# Altium PCB MB_v1.PcbDoc (part 3 of 10)
Units mm, origin at the board's own origin, x right, y up, seen from the top; angles counter-clockwise.
Board outline 203 x 72 mm, 6 copper layers (Top Layer, Layer 3, Layer 1, Layer 2, Layer 4, Bottom Layer), stack 1.52 mm thick; 655 components, 569 nets, 2943 pads, 1834 vias.
Unrouted connection lines stored in the file: 31.
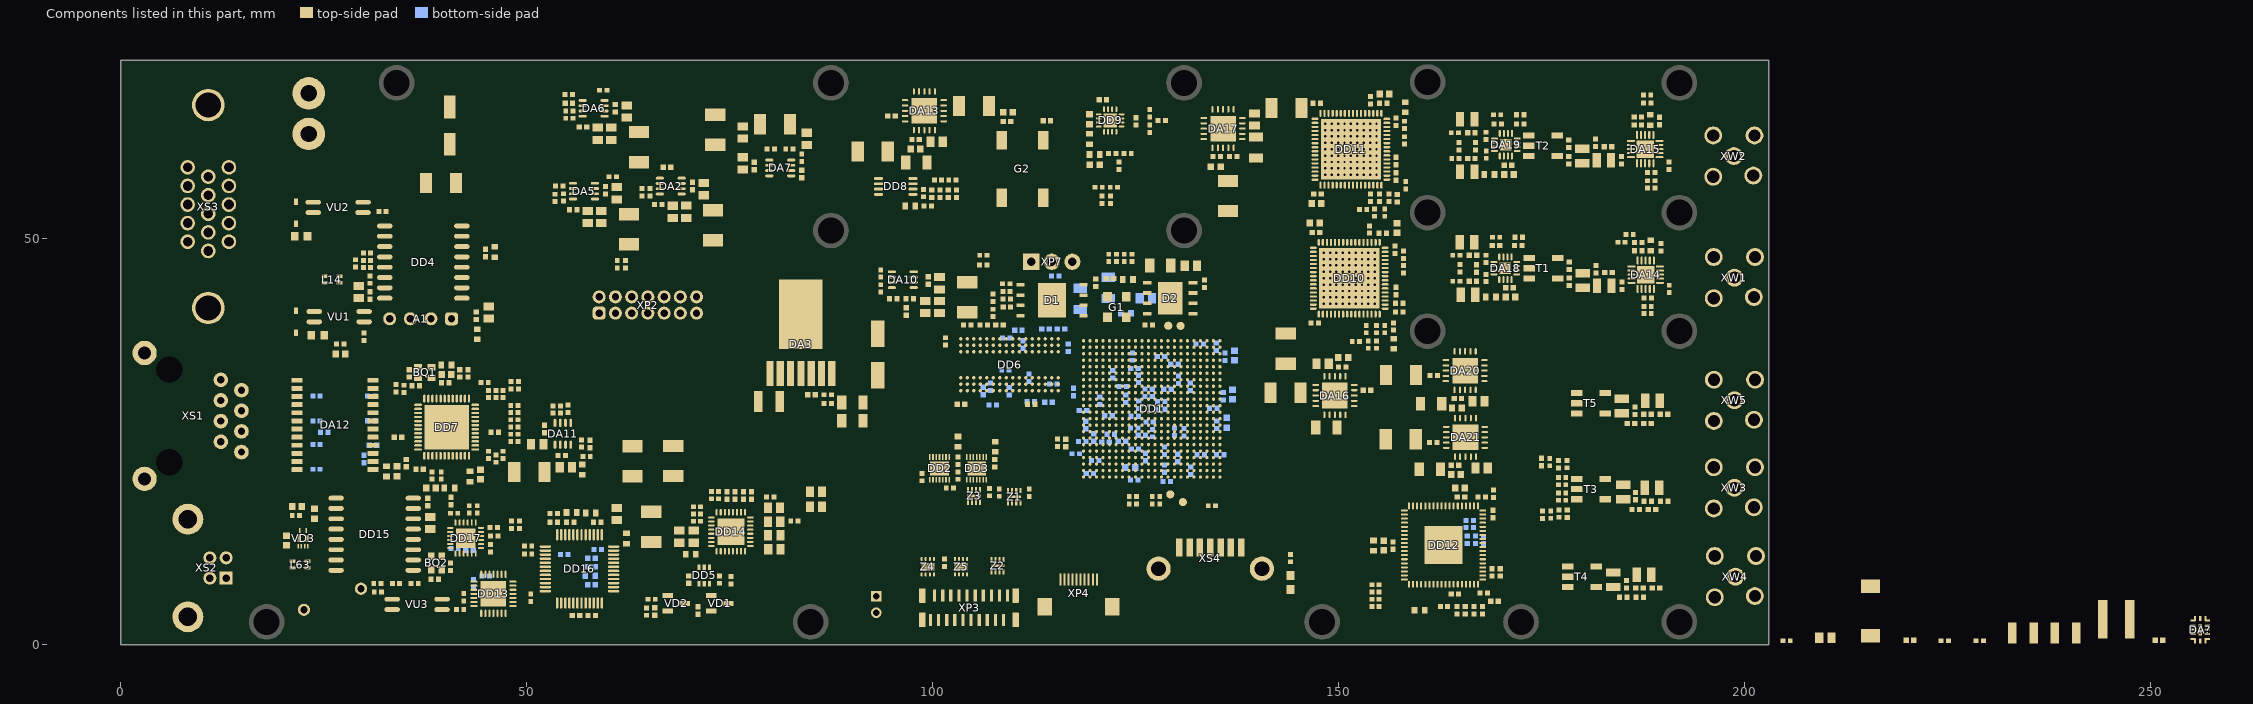
[diagram p6: the components of this part, seen from the top]

## Part data (continued)
R10 R124 R127 R170: library part "Чип резистор 0402 *", "ЧИП-резистор", Tolerance=±5%, PackageReference=0402, TKE="100 ppm/°С"
R11 R12 R14 R19 R151 R156 R158 R159 R163: library part "Чип резистор 0402 20 кОм, 5%", "ЧИП-резистор", Tolerance=±5%, PackageReference=0402, TKE="100 ppm/°С"
R13: library part "Чип резистор 0402 27 кОм, 5%", "ЧИП-резистор", Tolerance=±5%, PackageReference=0402, TKE="100 ppm/°С"
R15: library part "Чип резистор 0402 33 кОм, 5%", "ЧИП-резистор", Tolerance=±5%, PackageReference=0402, TKE="100 ppm/°С"
R17: library part "Чип резистор 0402 39 кОм, 5%", "ЧИП-резистор", Tolerance=±5%, PackageReference=0402, TKE="100 ppm/°С"
R22 R31 R32 R58 R160: library part "Чип резистор 0402 4,7 кОм, 5%", "ЧИП-резистор", Tolerance=±5%, PackageReference=0402, TKE="100 ppm/°С"
R23 R26: library part "Чип резистор 0402 510 Ом, 5%", "ЧИП-резистор", Tolerance=±5%, PackageReference=0402, TKE="100 ppm/°С"
R24 R25: library part "Чип резистор 0402 4,7 кОм, 1%", "ЧИП-резистор", Tolerance=±1%, PackageReference=0402, TKE="100 ppm/°С"
R33 R34 R35 R36 R40 R41: library part "Чип резистор 0402 180 кОм, 5%", "ЧИП-резистор", Tolerance=±5%, PackageReference=0402, TKE="100 ppm/°С"
R37 R44 R114 R122: library part "Чип резистор 0402 2 кОм, 5%", "ЧИП-резистор", Tolerance=±5%, PackageReference=0402, TKE="100 ppm/°С"
R38 R39 R144: library part "Чип резистор 0402 820 Ом, 5%", "ЧИП-резистор", Tolerance=±5%, PackageReference=0402, TKE="100 ppm/°С"
R42 R43 R109 R110 R111 R112: library part "Чип резистор 0402 15 Ом, 5%", "ЧИП-резистор", Tolerance=±5%, PackageReference=0402, TKE="100 ppm/°С"
R45: library part "Чип резистор 0402 3,3 кОм, 5%", "ЧИП-резистор", Tolerance=±5%, PackageReference=0402, TKE="100 ppm/°С"
R46: library part "Чип резистор 0402 120 Ом, 5%", "ЧИП-резистор", Tolerance=±5%, PackageReference=0402, TKE="100 ppm/°С"
R47 R48 R56: library part "Чип резистор 0402 80,6 Ом, 1%_1", "ЧИП-резистор", Tolerance=±1%, PackageReference=0402, TKE="100 ppm/°С"
R50: library part "Чип резистор 0402 9,53 кОм, 1%", "ЧИП-резистор", Tolerance=±1%, PackageReference=0402, TKE="100 ppm/°С"
R52 R53 R54 R55 R61 R75 R76 R78 R79 R81 R83 R98 R100 R119 R121 R123 R125 R139: library part "Чип резистор 0402 1 кОм, 5%", "ЧИП-резистор", Tolerance=±5%, PackageReference=0402, TKE="100 ppm/°С"
R57: library part "Чип резистор 0402 240 Ом, 5%", "ЧИП-резистор", Tolerance=±5%, PackageReference=0402, TKE="100 ppm/°С"
R60 R65 R66 R67 R68 R69: library part "Чип резистор 0402 22 Ом, 5%", "ЧИП-резистор", Tolerance=±5%, PackageReference=0402, TKE="100 ppm/°С"
R63: library part "Чип резистор 0402 5,76 кОм, 1%", "ЧИП-резистор", Tolerance=±1%, PackageReference=0402, TKE="100 ppm/°С"
R70: library part "Чип резистор 0402 120 кОм, 5%", "ЧИП-резистор", Tolerance=±5%, PackageReference=0402, TKE="100 ppm/°С"